# Altium PCB iDProxRev2.PcbDoc
Units mil, origin at the board's own origin, x right, y up, seen from the top; angles counter-clockwise.
Board outline 6000 x 4000 mil, 2 copper layers (Top Layer, Bottom Layer); 48 components, 38 nets, 124 pads, 4 vias.
Unrouted connection lines stored in the file: 82.
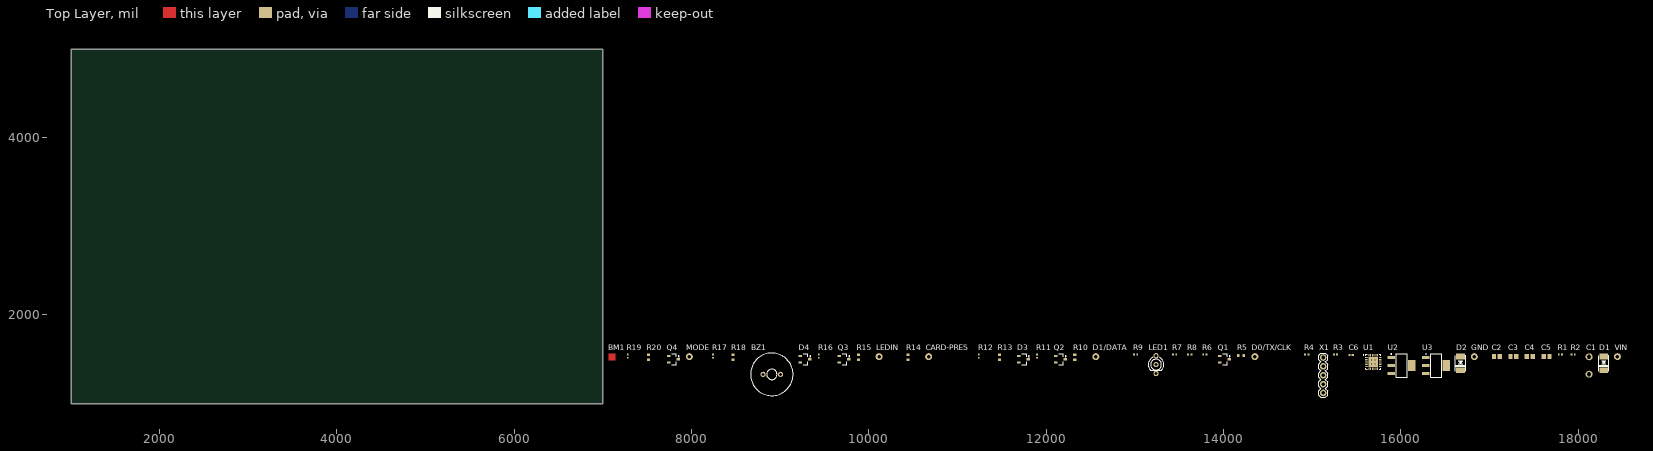
[diagram p0: Top Layer view]
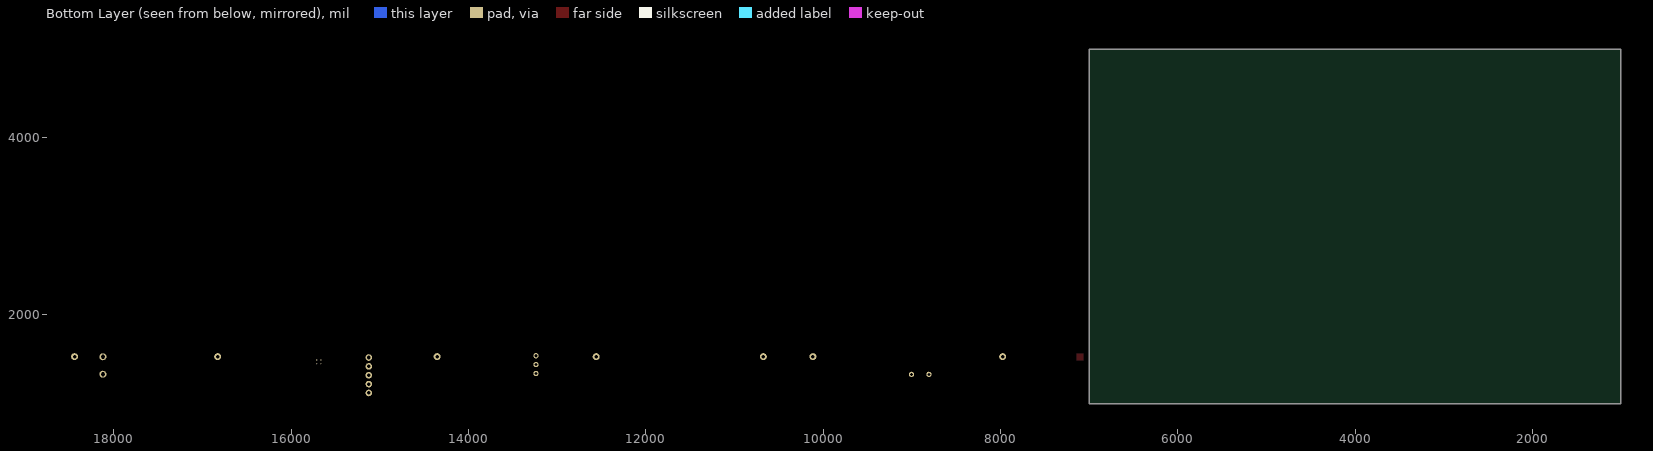
[diagram p1: Bottom Layer view, seen from below]

## Layer stack, top to bottom
Top Solder: solder mask 0.4, Solder Resist, Dk 3.5
Top Layer: signal copper 1.4
Dielectric 1: dielectric 12.6, FR-4, Dk 4.8
Bottom Layer: signal copper 1.4
Bottom Solder: solder mask 0.4, Solder Resist, Dk 3.5

## Board outline
1000,1000 7000,1000 7000,5000 1000,5000

## Design rules (kind name [scope] priority, off if disabled: settings)
Clearance [All] p1: gap=10
PolygonConnect [All] p1: connectstyle=Relief reliefconductorwidth=10 reliefentries=4 polygonreliefangle="90 Angle" airgapwidth=10
RoomDefinition iDProxRev2 [InComponentClass('iDProxRev2')] p1: confinementstyle=ConfineIn formatcopy=TRUE lockcomponents=FALSE outline 7045,1060 18580,1060 18580,1680 7045,1680
RoutingVias [All] p1: holewidth=28 width=50 viastyle="Through Hole" minholewidth=28 minwidth=50 maxholewidth=28 maxwidth=50
SolderMaskExpansion [All] p1: expansion=4
Width [All] p1: maxlimit=10 minlimit=10 preferedwidth=10
30 further rules are at their usual default settings.

## Components (designator, comment, footprint, x,y, rotation, side; value= is the part's Value field where it differs from the comment)
BM1 "BADMARK" BADMARK 7100,1525 r0 top
BZ1 "Buzzer" Buzzer 8905,1330 r0 top
C1 "ESK108M016AH2AA" ESK108M016AH2AA 18125,1430 r90 top
C2 "Cap0805" C0805 17085,1530 r0 top
C3 "Cap0805" C0805 17270,1530 r0 top
C4 "Cap0805" C0805 17455,1530 r0 top
C5 "Cap0805" C0805 17645,1530 r0 top
C6 "Cap0402" C0402 15440,1550 r0 top
CARD-PRES "Hole" Hole 10675,1530 r90 top
D0/TX/CLK "Hole" Hole 14355,1530 r90 top
D1 "B360A-13-F" SMA 18290,1455 r90 top
D1/DATA "Hole" Hole 12560,1530 r90 top
D2 "SMAJ14A" SMA 16675,1455 r90 top
D3 "BAT54S" SOT23-3 11745,1500 r0 top
D4 "BAT54S" SOT23-3 9280,1500 r0 top
GND "Hole" Hole 16830,1530 r0 top
LED1 "LTL1BEKVJNN" LTL1BEKVJNN 13240,1440 r0 top
LEDIN "Hole" Hole 10115,1530 r90 top
MODE "Hole" Hole 7975,1530 r90 top
Q1 "MMBT4401" SOT23-3 14010,1500 r0 top
Q2 "MMBT4401" SOT23-3 12160,1500 r0 top
Q3 "MMBT4401" SOT23-3 9720,1500 r0 top
Q4 "MMBT4401" SOT23-3 7795,1500 r0 top
R1 "Res0402" R0402 17800,1555 r0 top
R2 "Res0402" R0402 17945,1555 r0 top
R3 "Res0402" R0402 15265,1555 r0 top
R4 "Res0402" R0402 14940,1555 r0 top
R5 "Res0603" R0603 14225,1525 r0 top
R6 "Res0402" R0402 13790,1555 r0 top
R7 "Res0402" R0402 13450,1555 r0 top
R8 "Res0402" R0402 13620,1555 r0 top
R9 "Res0402" R0402 13010,1555 r0 top
R10 "Res0603" R0603 12340,1550 r90 top
R11 "Res0402" R0402 11895,1535 r90 top
R12 "Res0402" R0402 11240,1535 r90 top
R13 "Res0603" R0603 11490,1550 r90 top
R14 "Res0603" R0603 10460,1550 r90 top
R15 "Res0603" R0603 9900,1550 r90 top
R16 "Res0402" R0402 9435,1535 r90 top
R17 "Res0402" R0402 8240,1535 r90 top
R18 "Res0603" R0603 8485,1550 r90 top
R19 "Res0402" R0402 7280,1535 r90 top
R20 "Res0603" R0603 7530,1550 r90 top
U1 "MKL03Z32VFK4" QFN24 15690,1470 r0 top
U2 "NCP1117LPST50T3G" SOT223 16010,1430 r0 top
U3 "AP1117E33G-13" SOT223 16400,1430 r0 top
VIN "Hole" Hole 18445,1530 r0 top
X1 "SWD" 1X05 15125,1320 r90 top

## Footprints (in the part's own frame and the unit in brackets; to place one, negate y for a bottom-side part, rotate by r counter-clockwise, add the part's x,y. Pads: shape width x height; smd on the part's side, far side on the other; paste and mask are expansions set on the pad)
1X05 [mil]
  round 74 hole 40: 1(-200,0) 2(-100,0) 3(0,0) 4(100,0) 5(200,0)
  silkscreen extent -250,-50 250,50
BADMARK [mil]
  Top Layer region: -39.37,-39.37 39.37,-39.37 39.37,39.37 -39.37,39.37
Buzzer [mil]
  round 59.06 hole 31.5: 1(-98.43,0) 2(98.43,0)
  silkscreen extent -240,-240 240,240, body extent -240,-240 240,240, height 197
C0402 [mm] "Chip Capacitor, 2-Leads, Body 1,00x0,50mm, IPC Medium Density"
  rect 0.66x0.62 smd: 1(-0.44,0) 2(0.44,0)
  body extent -0.53,-0.28 0.53,0.27, height 0.55
C0805 [mm] "Chip Capacitor, 2-Leads, Body 2,00x1,25mm, IPC Medium Density"
  rect 1.25x1.45 smd: 1(-0.825,0) 2(0.825,0)
  body extent -1.1,-0.72 1.1,0.72, height 1.25
ESK108M016AH2AA [mm] "CAP ALUM 1000UF 20% 16V RADIAL"
  round 2 hole 1.2: 1(-2.5,0) 2(2.5,0)
Hole [mm] "PTH Hole for wire soldering"
  round 2 hole 1: 1(0,0)
LTL1BEKVJNN [mm] "LED GRN/RED DIFF 3MM ROUND T/H"
  round 1.5 hole 0.9: 1(0,-2.54) 2(0,0) 3(0,2.54)
  silkscreen extent -2.25,-1.55 2.25,2.05, body extent -2.02,-2.79 2.02,2.79, height 7.51
QFN24 [mm]
  oval 0.75x0.25 smd: 1(-1.95,1.25) 2(-1.95,0.75) 3(-1.95,0.25) 4(-1.95,-0.25) 5(-1.95,-0.75) 6(-1.95,-1.25) 13(1.95,-1.25) 14(1.95,-0.75) 15(1.95,-0.25) 16(1.95,0.25) 17(1.95,0.75) 18(1.95,1.25)
  oval 0.25x0.75 smd: 7(-1.25,-1.95) 8(-0.75,-1.95) 9(-0.25,-1.95) 10(0.25,-1.95) 11(0.75,-1.95) 12(1.25,-1.95) 19(1.25,1.95) 20(0.75,1.95) 21(0.25,1.95) 22(-0.25,1.95) 23(-0.75,1.95) 24(-1.25,1.95)
  rect 2.8x2.8 smd: 25(0,0)
  silkscreen extent -2.92,-2.15 2.15,2.15, body extent -2,-2 2,2, height 0.9
R0402 [mm] "Chip Resistor, 2-Leads, Body 1,00x0,50mm, IPC Medium Density"
  rect 0.55x0.55 smd: 1(-0.45,0) 2(0.45,0)
  body extent -0.53,-0.27 0.53,0.28, height 0.45
R0603 [mm] "Chip Resistor, 2-Leads, Body 1.60x0.80mm, IPC Medium Density"
  rect 0.7x0.9 smd: 1(-1.45,0.45) 2(0.05,0.45)
  body extent -1.55,0 0.15,0.9, height 0.45
SMA [mm]
  rect 1.7x2.5 smd: 1(2,0) 2(-2,0)
  silkscreen extent -2.3,-1.46 2.3,1.46, body extent -2.5,-1.35 2.5,1.35, height 2.15
SOT23-3 [mm]
  rect 1x0.6 smd: 1(1.35,0) 2(-1.35,0.95) 3(-1.35,-0.95)
  silkscreen extent -0.45,-1.55 1.63,1.55, body extent -1.25,-1.5 1.25,1.5, height 1.1
SOT223 [mm] "SOT223, 4-Leads, Body 6,50x7,00mm (avg), Pitch 2,30mm, IPC Medium Density"
  rect 2.15x0.9 smd: 1(-2.925,2.3) 2(-2.925,0) 3(-2.925,-2.3)
  rect 2.15x3.2 smd: 2(2.925,0)
  silkscreen extent -3.05,-3.35 1.55,3.42, body extent -3.5,-3.25 3.5,3.25, height 1.65

## Part data
BM1: "Bad Mark Indicator"
BZ1: "Standard PTH Buzzer"
C1: "CAP ALUM 1000UF 20% 16V RADIAL"
C2 C3 C4 C5 C6: "Capacitor"
D1: library part B360A, "B360A Diode"
D2: "TVS DIODE 14VWM 23.2VC SMA"
D3 D4: "DIODE ARRAY SCHOTTKY 30V SOT23"
LED1: "LED GRN/RED DIFF 3MM ROUND T/H"
Q1 Q2 Q3 Q4: library part MMBT4401LT3G, "TRANS NPN 40V 0.6A SOT-23"
R1 R2 R3 R4 R5 R6 R7 R8 R9 R10 R11 R12 R13 R14 R15 R16 R17 R18 R19 R20: "Resistor"
U1: "IC MCU 32BIT 32KB FLASH 24QFN"
U2: "IC REG LDO 5V 1A SOT223"
X1: library part "Header 5", "Header, 5-Pin, Single row, 0.1\""

## Via types
v1: diameter 19.68, hole 7.87, Top Layer to Bottom Layer, 4 vias

## Nets (pads, with @x,y where several pads share a name; then routed paths per layer and width w, separated by ;. In a path a pad name is that pad's centre, name@x,y a point inside that pad or via, vN(x,y) a via of type N, cw(c..) or ccw(c..) an arc to the next point about the centre after c; other vN are vias at no path point)
5V: BZ1.1 C3.2 C4.1 R4.2 R9.2 R12.2 R17.2 U2.2 U3.3
+3V3: C5.2 C6.2 D3.3 D4.3 R1.2 R2.2 R3.2 R13.2 R18.2 U1.3 U3.2 X1.1
GND: C1.2 C2.2 C3.1 C4.2 C5.1 C6.1 D2.1 D3.2 D4.2 GND.1 LED1.2 Q1.3 Q2.3 Q3.3 Q4.3 U1.4 U1.25 U2.1 U3.1 X1.5
  other v1: 15668.35,1448.35 15711.65,1448.35 15668.35,1491.65 15711.65,1491.65
NetBZ1_2: BZ1.2 Q4.1 R17.1
NetC1_1: C1.1 C2.1 D1.2 D2.2 U2.3
NetCARD-PRES_1: CARD-PRES.1 R14.1
NetD0/TX/CLK_1: D0/TX/CLK.1 R5.1
NetD1/DATA_1: D1/DATA.1 R10.1
NetD3_1: D3.1 R15.2 U1.17
NetD4_1: D4.1 R20.2 U1.14
NetLED1_1: LED1.1 R7.1
NetLED1_3: LED1.3 R8.1
NetLEDIN_1: LEDIN.1 R13.1 R15.1
NetMODE_1: MODE.1 R18.1 R20.1
NetQ1_1: Q1.1 R4.1 R5.2
NetQ1_2: Q1.2 R6.2
NetQ2_1: Q2.1 R9.1 R10.2
NetQ2_2: Q2.2 R11.2
NetQ3_1: Q3.1 R12.1 R14.2
NetQ3_2: Q3.2 R16.2
NetQ4_2: Q4.2 R19.1
NetR1_1: R1.1 U1.6
NetR2_1: R2.1 U1.5
NetR3_1: R3.1 U1.23 X1.2
NetR6_1: R6.1 U1.13
NetR7_2: R7.2 U1.15
NetR8_2: R8.2 U1.7
NetR11_1: R11.1 U1.11
NetR16_1: R16.1 U1.16
NetR19_2: R19.2 U1.2
NetRF1_3: U1.1
NetRF1_6: U1.8
NetRF1_7: U1.9
NetRF1_8: U1.10
NetRF1_9: U1.20
NetU1_22: U1.22 X1.4
NetU1_24: U1.24 X1.3
VIN: D1.1 VIN.1
pads on no net: U1.12 U1.18 U1.19 U1.21